# EAGLE board cerebellar (EAGLE 9.6.2)
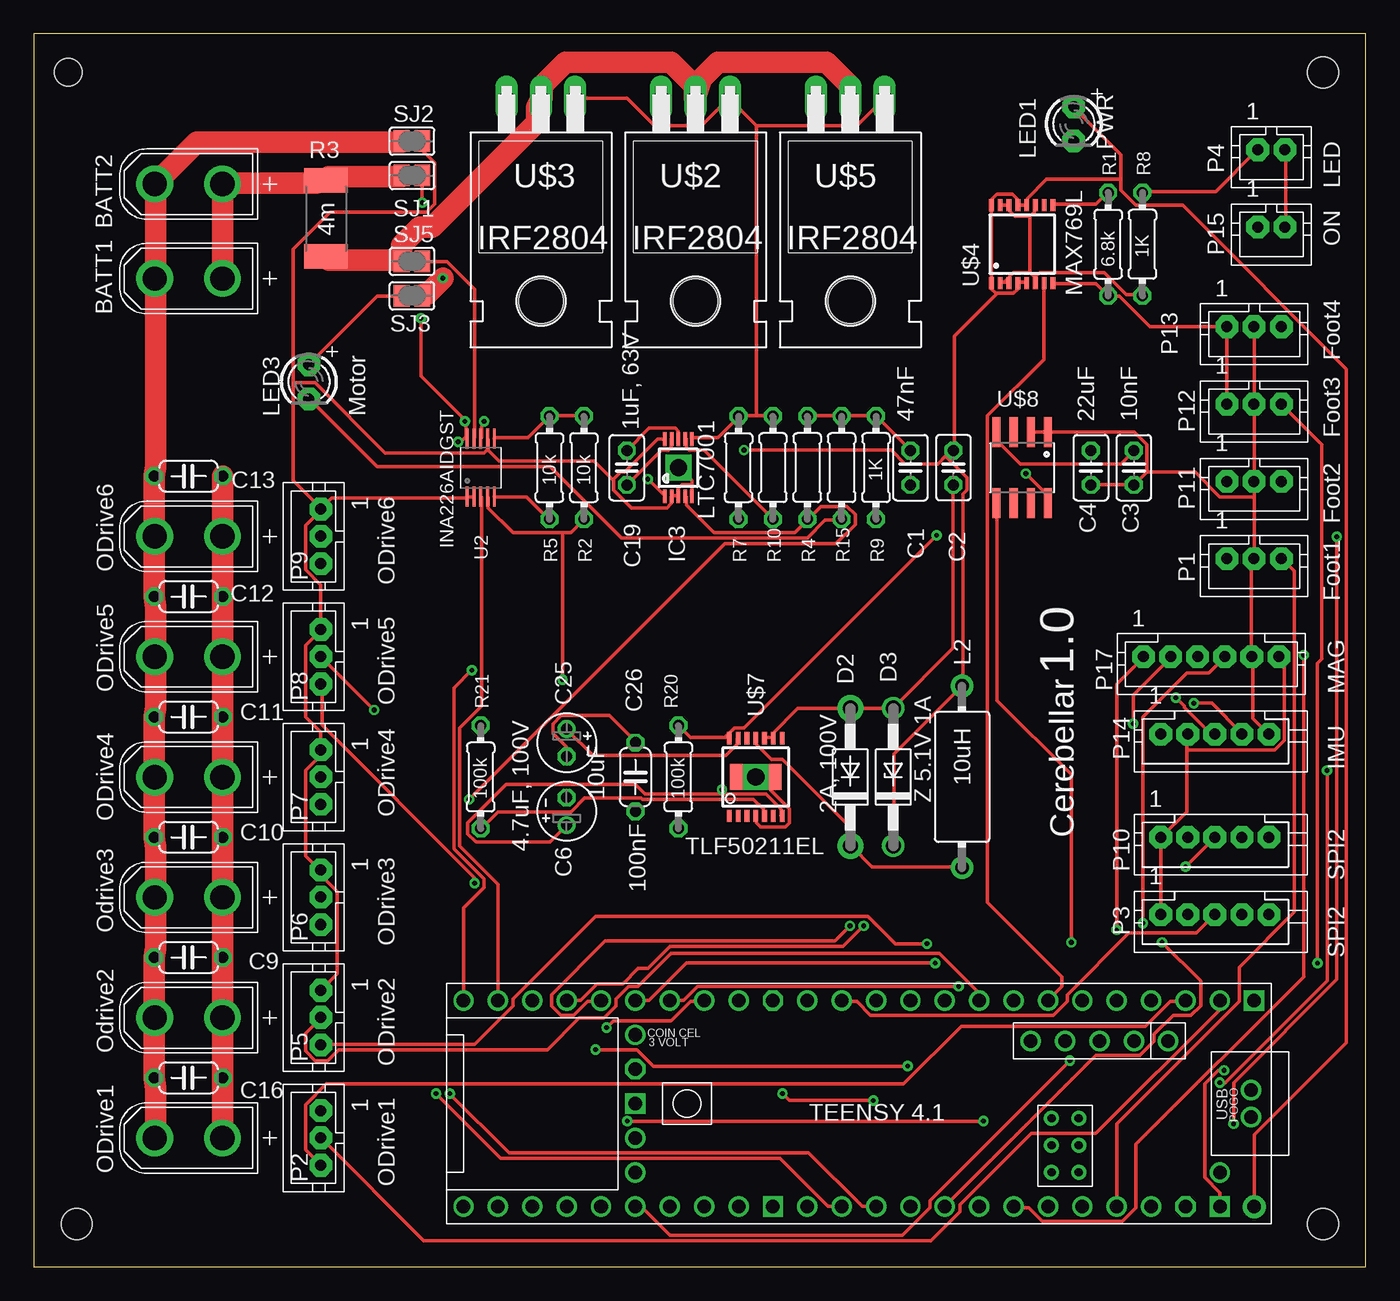
[diagram p0: board, top side]
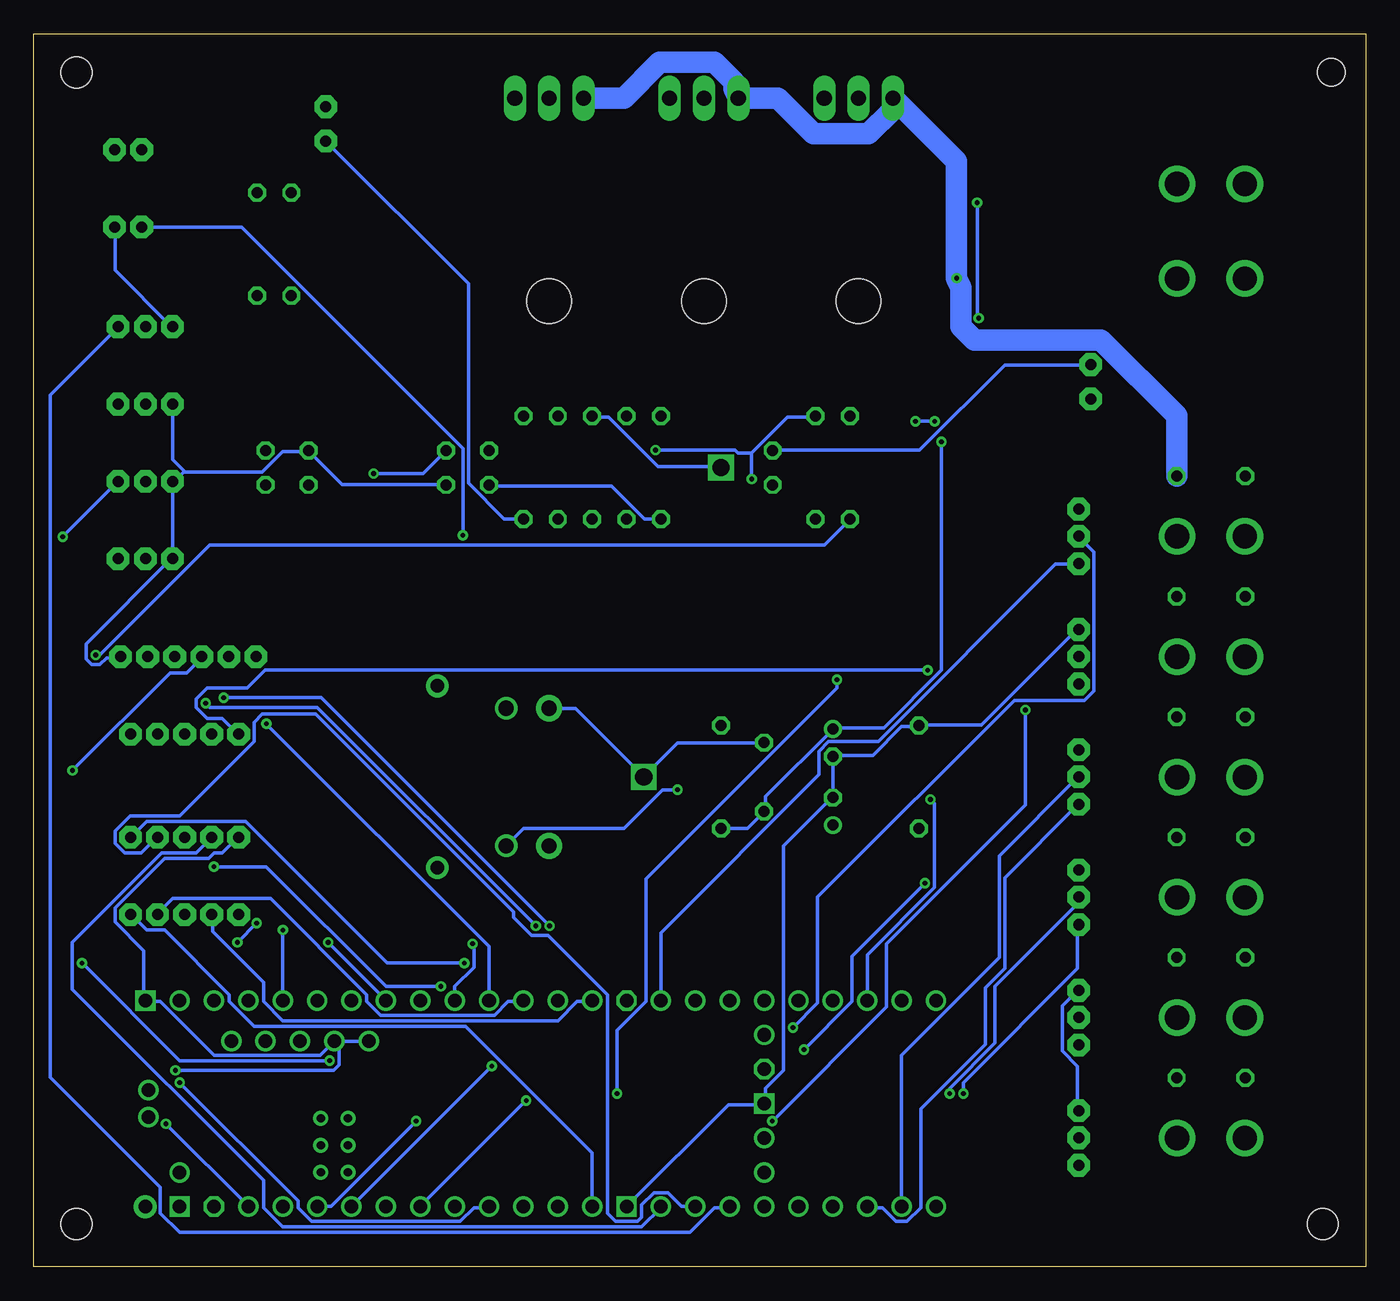
[diagram p1: board, bottom side, seen from below]

Size 98.41 x 91.11 mm. Coordinates in mm from the lower left corner, seen from the top.
Outline: 0,0 98.41,0 98.41,91.11 0,91.11 0,0
Copper layers (1*16): Top 0.035mm / dielectric 1.5mm / Bottom 0.035mm
Design rules "default": minimum track width 6mil, minimum drill 0.35mm, track to track 6mil, track to pad 6mil, pad to pad 6mil, via to via 6mil, smd to smd 6mil, copper to edge 40mil, drill to drill 6mil, minimum pad ring 10mil, minimum via ring 8mil, stop-mask expansion 4mil, vias tented up to drill 0mil, thermal gap 10mil
Net classes: 0 default: width 0.254 mm; 1 Battery: width 1.575 mm
Holes 2.03 mm at 2.54,88.27
Holes 2.29 mm at 3.17,3.17 95.25,88.27 95.25,3.17

## Footprints (pad centres in the part's own frame; a part is rotated, then mirrored left to right if it is on the bottom)
XT30UPB-M = drill 1.8: + 2.5,0; - -2.5,0
C025-025X050 = drill 0.813 octagon: 1 -1.27,0; 2 1.27,0
E2-4 = drill 0.813 pad 1.27: + -1.016,0 | drill 0.813 pad 1.27 octagon: - 1.016,0
C050-024X044 = drill 0.813 octagon: 1 -2.54,0; 2 2.54,0
DO41-10 = drill 1.118 pad 1.93: A 5.08,0; C -5.08,0
DO41Z10 = drill 1.118: A 5.08,0; C -5.08,0
MSOP10 = smd 0.25 x 1: 1 -1,-2.113; 2 -0.5,-2.113; 3 0,-2.113; 4 0.5,-2.113; 5 1,-2.113; 6 1,2.113; 7 0.5,2.113; 8 0,2.113; 9 -0.5,2.113; 10 -1,2.113 | drill 1.27 square: 11 0,0 | smd 1.524 x 1.524: 12 0,0
IRF-3 = drill 1 pad 1.676: 1 -6.705,0; 2 6.73,0
LED3MM = drill 0.813 pad 1.676 octagon: A -1.27,0; K 1.27,0
JST-PH3 = drill 0.813 pad 1.676 octagon: 1 2.016,-1.524; 2 0.016,-1.524; 3 -2.016,-1.524
JST-PH5 = drill 0.813 pad 1.676 octagon: 1 5,0; 2 3,0; 3 1,0; 4 -1,0; 5 -3,0
JST-PH2 = drill 0.813 pad 1.676 octagon: 1 1,0; 2 -1,0
JST-PH6 = drill 0.813 pad 1.676 octagon: 1 5,0; 2 3,0; 3 1,0; 4 -1,0; 5 -3,0; 6 -5,0
0204/7 = drill 0.813 octagon: 1 -3.81,0; 2 3.81,0
R2512 = smd 1.8 x 3.2: 1 -2.8,0; 2 2.8,0
SJ = smd 1.168 x 1.6: 1 -0.762,0; 2 0.762,0
SOP50P490X110-10N = smd 1.47 x 0.28: 1 -2.15,1; 2 -2.15,0.5; 3 -2.15,0; 4 -2.15,-0.5; 5 -2.15,-1; 6 2.15,-1; 7 2.15,-0.5; 8 2.15,0; 9 2.15,0.5; 10 2.15,1
TEENSY41 = drill 1: 0-RX1/CS1/CRX2 -27.94,-7.62; 1-TX1/MISO1/CTX2 -25.4,-7.62; 2-OUT2 -22.86,-7.62; 3-LRCLK2 -20.32,-7.62; 4-BCLK2 -17.78,-7.62; 5-IN2 -15.24,-7.62; 6-OUT1D -12.7,-7.62; 7-RX2/OUT1A -10.16,-7.62; 8-TX2/IN1 -7.62,-7.62; 9-OUT1C -5.08,-7.62; 10-CS\MQSR -2.54,-7.62; 11-MOSI/CTX1 0,-7.62; 12-MISO/MQSL 2.54,-7.62; 13-SCK/LED 2.54,7.62; 14-A0/TX3/SPDIF_OUT 0,7.62; 15-A1/RX3/SPDIF_IN -2.54,7.62; 16-A2/RX4/SCL1 -5.08,7.62; 17-A3/TX4/SDA1 -7.62,7.62; 18-A4/SDA0 -10.16,7.62; 19-A5/SCL0 -12.7,7.62; 20-A6/TX5/LRCLK1 -15.24,7.62; 21-A7/RX5/BCLK1 -17.78,7.62; 22-A8/CTX1 -20.32,7.62; 23-A9/CRX1/MCLK1 -22.86,7.62; 24-A10/TX6/SCL2 7.62,-7.62; 25-A11/RX6/SDA2 10.16,-7.62; 26-A12/MOSI1 12.7,-7.62; 27-A13/SCK1 15.24,-7.62; 28-RX7 17.78,-7.62; 29-TX7 20.32,-7.62; 30-CRX3 22.86,-7.62; 31-CTX3 25.4,-7.62; 32-OUT1B 27.94,-7.62; 33-MCLK2 27.94,7.62; 34-RX8 25.4,7.62; 35-TX8 22.86,7.62; 36-PWM 20.32,7.62; 37-PWM 17.78,7.62; 38-A14/CS/IN1 15.24,7.62; 39-A15/CS/OUT1A 12.7,7.62; 40-A16/CS1 10.16,7.62; 41-A17/MISO1 7.62,7.62; +5V -24.13,-4.62; D+ -30.25,-1; D- -30.25,1; DM -21.59,-4.62; DP -19.05,-4.62; GND4 -16.51,-4.62; GND5 -13.97,-4.62; ON/OFF 15.24,5.08; PROGRAM 15.24,2.54; VBAT 15.24,-5.08; VUSB -27.94,5.08 | drill 1 octagon: 3V3-1 5.08,-7.62; 3V3-2 15.24,-2.54; 3V3-3 -25.4,7.62 | drill 0.6: G -15.51,3.08; LED -17.51,3.08; R+ -17.51,5.08; R- -15.51,5.08; T+ -15.51,1.08; T- -17.51,1.08 | drill 1 square: GND1 -30.48,-7.62; GND2 15.24,0; GND3 5.08,7.62; GND6 -27.94,7.62 | drill 1 pad 1.676: VIN -30.48,7.62
TO-220H = drill 1.118 long: 1 -2.54,-7.62; 2 0,-7.62; 3 2.54,-7.62 | hole 3.302: 0,7.366
TSSOP-16 = smd 0.9 x 0.35: 1 -2.875,2.275; 2 -2.875,1.625; 3 -2.875,0.975; 4 -2.875,0.325; 5 -2.875,-0.325; 6 -2.875,-0.975; 7 -2.875,-1.625; 8 -2.875,-2.275; 9 2.875,-2.275; 10 2.875,-1.625; 11 2.875,-0.975; 12 2.875,-0.325; 13 2.875,0.325; 14 2.875,0.975; 15 2.875,1.625; 16 2.875,2.275
TSSOP-14 = smd 0.9 x 0.35: 1 -2.875,1.95; 2 -2.875,1.3; 3 -2.875,0.65; 4 -2.875,0; 5 -2.875,-0.65; 6 -2.875,-1.3; 7 -2.875,-1.95; 8 2.875,-1.95; 9 2.875,-1.3; 10 2.875,-0.65; 11 2.875,0; 12 2.875,0.65; 13 2.875,1.3; 14 2.875,1.95 | smd 1.93 x 3.81: 15 0,0 | drill 1.27 square: 16 0,0
SO08 = smd 0.61 x 2.21: 1 -1.905,-2.616; 2 -0.635,-2.616; 3 0.635,-2.616; 4 1.905,-2.616; 5 1.905,2.616; 6 0.635,2.616; 7 -0.635,2.616; 8 -1.905,2.616

## Placement (x,y rotation side)
BATT1  XT30UPB-M  [XT30UPB-M]  11.43,73.03 0 top
BATT2  XT30UPB-M  [XT30UPB-M]  11.43,80.01 0 top
C1  47nF  [C025-025X050]  64.77,59.05 90 top
C2  100nF  [C025-025X050]  67.94,59.05 270 top
C3  10nF  [C025-025X050]  81.28,59.05 90 top
C4  22uF  [C025-025X050]  78.1,59.05 90 top
C6  10uF  [E2-4]  39.37,33.66 90 top
C9  2.2uF  [C050-024X044]  11.43,22.86 180 top
C10  2.2uF  [C050-024X044]  11.43,31.75 180 top
C11  2.2uF  [C050-024X044]  11.43,40.64 180 top
C12  2.2uF  [C050-024X044]  11.43,49.53 180 top
C13  2.2uF  [C050-024X044]  11.43,58.42 180 top
C16  2.2uF  [C050-024X044]  11.43,13.97 180 top
C19  1uF, 63V  [C025-025X050]  43.82,59.05 90 top
C25  4.7uF, 100V  [E2-4]  39.37,38.73 270 top
C26  100nF  [C050-024X044]  44.45,36.2 90 top
CON2  ODrive1  [XT30UPB-M]  11.43,9.53 0 top
CON4  Odrive3  [XT30UPB-M]  11.43,27.3 0 top
CON5  ODrive4  [XT30UPB-M]  11.43,36.2 0 top
CON6  Odrive2  [XT30UPB-M]  11.43,18.41 0 top
CON7  ODrive5  [XT30UPB-M]  11.43,45.09 0 top
CON8  ODrive6  [XT30UPB-M]  11.43,53.98 0 top
D2  2A, 100V  [DO41-10]  60.33,36.2 90 top
D3  Z 5.1V 1A  [DO41Z10]  63.5,36.2 90 top
IC3  LTC7001  [MSOP10]  47.62,59.05 0 top
L2  10uH  [IRF-3]  68.58,36.2 90 top
LED1  PWR  [LED3MM]  76.83,84.45 270 top
LED3  Motor  [LED3MM]  20.32,65.41 270 top
P1  Foot1  [JST-PH3]  90.17,50.8 180 top
P2  ODrive1  [JST-PH3]  19.69,9.53 90 top
P3  SPI2  [JST-PH5]  88.27,26.04 180 top
P4  LED  [JST-PH2]  91.44,82.55 180 top
P5  ODrive2  [JST-PH3]  19.69,18.41 90 top
P6  ODrive3  [JST-PH3]  19.69,27.3 90 top
P7  ODrive4  [JST-PH3]  19.69,36.2 90 top
P8  ODrive5  [JST-PH3]  19.69,45.09 90 top
P9  ODrive6  [JST-PH3]  19.69,53.98 90 top
P10  SPI2  [JST-PH5]  88.27,31.75 180 top
P11  Foot2  [JST-PH3]  90.17,56.52 180 top
P12  Foot3  [JST-PH3]  90.17,62.23 180 top
P13  Foot4  [JST-PH3]  90.17,67.94 180 top
P14  IMU  [JST-PH5]  88.27,39.37 180 top
P15  ON  [JST-PH2]  91.44,76.83 180 top
P17  MAG  [JST-PH6]  86.99,45.09 180 top
R1  6.8k  [0204/7]  79.38,75.56 270 top
R2  10k  [0204/7]  40.64,59.05 270 top
R3  4m  [R2512]  21.59,77.47 270 top
R4  10k  [0204/7]  57.15,59.05 90 top
R5  10k  [0204/7]  38.1,59.05 270 top
R7  10  [0204/7]  52.07,59.05 270 top
R8  1K  [0204/7]  81.91,75.56 90 top
R9  1K  [0204/7]  62.23,59.05 90 top
R10  100k  [0204/7]  54.61,59.05 90 top
R15  3.3k  [0204/7]  59.69,59.05 90 top
R20  100k  [0204/7]  47.62,36.2 90 top
R21  100k  [0204/7]  33.02,36.2 90 top
SJ1  0  [SJ]  27.94,80.64 0 top
SJ2  0  [SJ]  27.94,83.19 0 top
SJ3  0  [SJ]  27.94,71.75 0 top
SJ5  0  [SJ]  27.94,74.3 180 top
U2  INA226AIDGST  [SOP50P490X110-10N]  33.02,59.05 90 top
U$1  TEENSY41  [TEENSY41]  59.69,12.06 180 top
U$2  IRF2804  [TO-220H]  48.9,78.74 180 top
U$3  IRF2804  [TO-220H]  37.46,78.74 180 top
U$4  MAX769L  [TSSOP-16]  73.02,75.56 90 top
U$5  IRF2804  [TO-220H]  60.33,78.74 180 top
U$7  TLF50211EL  [TSSOP-14]  53.34,36.2 90 top
U$8  LT1763  [SO08]  73.02,59.05 180 top

## Library data of the parts
BATT1 BATT2 CON2 CON4-CON8 = amass
C1-C4 C6 C9-C13 C16 C19 C25 C26 = rcl; SPICEPREFIX: C
D2 LED1 LED3 = adafruit
D3 = diode
IC3 = LTC7001; MPN: AD7992BRMZ-0; OC_FARNELL: 1078311; OC_NEWARK: 31M4422
L2 = rcl; SPICEPREFIX: L
P1-P15 P17 = jst-ph
R1 R2 R4 R5 R7-R10 R15 R20 R21 = rcl; SPICEPREFIX: R
R3 = rcl; DIGIKEY: 541-WSK25124L000FEACT-ND; LINK: https://octopart.com/wsk25124l000fea-vishay-41934978?r=sp; MOUSER: 71-WSK25124L000FEA; SPICEPREFIX: R
SJ1-SJ3 SJ5 = jumper
U2 = INA226AIDGST; AVAILABILITY: In Stock; DESCRIPTION: 36V, 16-bit, ultra-precise i2c output current/voltage/power monitor w/alert; MF: Texas Instruments; MP: INA226AIDGST; PACKAGE: VSSOP-10 Texas Instruments; PRICE: None; PURCHASE-URL: https://pricing.snapeda.com/search/part/INA226AIDGST/?ref=eda
U$1 = teensy
U$2 U$3 U$5 = IRF2804
U$4 = MAX869
U$7 = TLF50211EL
U$8 = LT1763

## Nets
+3.3V: C3.1 C4.1 P1.2 P11.2 P12.2 P13.2 P14.5 P17.5 U$8.1 U$8.2
+5V: C2.1 C6.+ D3.C IC3.1 L2.2 LED1.A R2.1 R5.1 U2.6 U$1.VIN U$4.1 U$4.4 U$4.5 U$4.12 U$4.13 U$4.16 U$7.7 U$8.8
BATT+ [Battery]: BATT1.+ BATT2.+ R3.1 SJ1.1
BATT- [Battery]: BATT1.- BATT2.- C9.2 C10.2 C11.2 C12.2 C13.2 C16.2 CON2.- CON4.- CON5.- CON6.- CON7.- CON8.- SJ2.1
CS: P3.4 U$1.10-CS\MQSR
CS1: P10.4 U$1.40-A16/CS1
DRAIN [Battery]: R3.2 SJ5.2 U$2.2 U$3.2 U$5.2
GATE: IC3.6 R7.1 R10.2 U$2.1 U$3.1 U$5.1
GND: C1.2 C2.2 C4.2 C6.- C25.- C26.2 D2.A D3.A IC3.2 IC3.3 IC3.5 IC3.10 IC3.11 IC3.12 P1.1 P2.1 P3.1 P4.2 P5.1 P6.1 P7.1 P8.1 P9.1 P10.1 P11.1 P12.1 P13.1 P14.2 P15.2 P17.6 R1.2 R4.2 R9.2 R15.2 R21.2 SJ2.2 U2.1 U2.2 U2.7 U$1.GND1 U$1.GND2 U$1.GND3 U$1.GND4 U$1.GND5 U$1.GND6 U$4.8 U$7.4 U$7.9 U$7.10 U$7.15 U$7.16
IMU_ENABLE: P14.1 U$1.32-OUT1B
LED_PWM: U$1.5-IN2 U$4.7
MAG_EN: P17.2 U$1.9-OUT1C
MAG_INT: P17.1 U$1.3-LRCLK2
MAG_SCL: P17.3 U$1.16-A2/RX4/SCL1
MAG_SDA: P17.4 U$1.17-A3/TX4/SDA1
MISO: P3.2 U$1.12-MISO/MQSL
MISO1: P10.2 U$1.41-A17/MISO1
MOSI: P3.3 U$1.11-MOSI/CTX1
MOSI1: P10.3 U$1.26-A12/MOSI1
N$1: C1.1 R7.2
N$2: R1.1 U$4.9
N$3: P4.1 R8.2
N$4: IC3.7 R10.1
N$5: U2.3 U$1.31-CTX3
N$6: R8.1 U$4.2 U$4.3 U$4.6 U$4.11 U$4.14 U$4.15
N$7: U$1.3V3-3
N$8: C3.2 U$8.4
N$9: U$1.6-OUT1D U$8.5
N$10: IC3.4 R4.1 U$1.30-CRX3
N$17: R5.2 U2.5 U$1.19-A5/SCL0
N$18: SJ5.1 U2.9
N$22: R2.2 U2.4 U$1.18-A4/SDA0
N$24: C19.1 IC3.9
N$26: C19.2 IC3.8 LED3.A SJ3.1
N$30: LED3.K R15.1
N$39: LED1.K R9.1
N$42: D2.C L2.1 U$7.11
N$46: R21.1 U$7.5
N$47: P15.1 R20.2 U$7.14
O1_RX: P2.2 U$1.0-RX1/CS1/CRX2
O1_TX: P2.3 U$1.1-TX1/MISO1/CTX2
O2_RX: P5.2 U$1.7-RX2/OUT1A
O2_TX: P5.3 U$1.8-TX2/IN1
O3_RX: P6.2 U$1.15-A1/RX3/SPDIF_IN
O3_TX: P6.3 U$1.14-A0/TX3/SPDIF_OUT
O4_RX: P7.2 U$1.34-RX8
O4_TX: P7.3 U$1.35-TX8
O5_RX: P8.2 U$1.21-A7/RX5/BCLK1
O5_TX: P8.3 U$1.20-A6/TX5/LRCLK1
O6_RX: P9.2 U$1.25-A11/RX6/SDA2
O6_TX: P9.3 U$1.24-A10/TX6/SCL2
POWER+ [Battery]: C9.1 C10.1 C11.1 C12.1 C13.1 C16.1 CON2.+ CON4.+ CON5.+ CON6.+ CON7.+ CON8.+ SJ3.2 U$2.3 U$3.3 U$5.3
RXD: P14.4 U$1.29-TX7
SCK: P3.5 U$1.13-SCK/LED
SCK1: P10.5 U$1.27-A13/SCK1
SENS1: P1.3 U$1.22-A8/CTX1
SENS2: P11.3 U$1.23-A9/CRX1/MCLK1
SENS3: P12.3 U$1.38-A14/CS/IN1
SENS4: P13.3 U$1.39-A15/CS/OUT1A
TXD: P14.3 U$1.28-RX7
V+: C25.+ C26.1 R20.1 SJ1.2 U2.8 U2.10 U$7.13

## Tracks (layer width: path | path; a pad name or v marks a point on that pad's centre or on a via)
+3.3V
  Top 0.254: U$8.2 U$8.1 81.33,61.67 82.24,60.76 82.24,58.73 | 82.24,58.73 81.33,57.81 C3.1 81.23,57.81 78.18,57.81 C4.1 | P14.5 91.19,39.42 90.07,40.54 90.07,45.01 P17.5 89.97,45.21 89.97,52.02 90.17,52.22 P1.2 90.17,52.32 90.17,56.9 | 90.17,56.9 90.17,58.01 P11.2 90.17,58.12 90.17,63.7 P12.2 90.17,63.8 90.17,69.39 P13.2 | 82.24,58.73 85.8,58.73 87.63,56.9 90.17,56.9
+5V  (via drill 0.35)
  Top 0.254: 50.85,34.95 45.16,34.95 44.45,35.66 34.9,35.66 32.05,32.82 32.05,32 32.66,31.39 38.15,31.39 39.37,32.61 C6.+ | 50.85,34.95 54.1,34.95 55.22,33.83 55.22,33.33 U$7.7 | D3.C 63.55,31.19 63.55,37.9 68.53,42.88 L2.2 68.63,42.98 68.63,57.1 68.94,57.4 68.94,58.32 67.36,59.89 | U2.6 34.09,61.27 36.52,61.27 38.05,62.79 R5.1 38.15,62.89 40.59,62.89 R2.1 | v45.36,58.22 46.58,57 IC3.1 | U$8.8 74.93,57 v73.3,58.62 | 71.07,71.93 70.76,72.24 70.76,72.64 U$4.1 70.76,72.75 70.76,78.33 U$4.16 70.76,78.54 70.76,78.84 71.17,79.25 72.29,79.25 72.69,78.84 72.69,78.54 U$4.13 72.8,78.44 73.3,78.44 U$4.12 73.41,78.54 73.41,78.94 74.83,80.37 80.31,80.37 | 71.07,71.93 72.39,71.93 72.69,72.24 72.69,72.64 U$4.4 72.8,72.75 73.3,72.75 U$4.5 | U$1.VIN 90.17,9.75 96.98,16.56 96.98,66.34 84.89,78.44 81.43,78.44 80.31,79.55 80.31,80.37 | 80.31,80.37 80.31,82.19 76.86,85.65 LED1.A | 71.07,71.93 71.07,71.83 68.02,68.78 68.02,60.35 C2.1 67.82,60.35 67.36,59.89 | v52.48,60.35 63.35,60.35 64.36,59.33 66.8,59.33 67.36,59.89 | v50.85,35.26 50.85,34.95
  Bottom 0.254: 45.36,60.15 v45.36,58.22 | 45.36,60.15 42.72,62.79 40.69,62.79 R2.1 | v73.3,58.62 69.65,58.62 C2.1 | 45.36,60.15 46.38,60.15 46.58,60.35 v52.48,60.35 | v50.85,35.26 51.97,35.26 54.81,32.41 62.23,32.41 63.45,31.19 D3.C
BATT+
  Top 1.575: SJ1.1 27.18,80.57 21.79,80.57 21.59,80.37 R3.1 20.88,80.06 13.97,80.06 BATT2.+ 13.97,79.25 13.97,73.05 BATT1.+
BATT-
  Top 1.575: SJ2.1 27.18,83.11 12.04,83.11 8.99,80.06 BATT2.- 8.99,79.25 8.99,73.05 BATT1.- 8.99,72.24 8.99,59.13 C13.2 8.89,54.76 CON8.- 8.89,53.95 C12.2 8.99,48.77 8.99,45.11 CON7.- 8.99,44.3 8.99,41.35 C11.2 8.89,36.98 CON5.- 8.89,36.17 C10.2 8.99,30.99 8.99,27.33 CON4.- 8.99,26.52 8.99,23.57 C9.2 8.89,19.2 CON6.- 8.89,18.39 C16.2 8.99,13.21 8.99,9.55 CON2.-
CS
  Bottom 0.254: U$1.10-CS\MQSR 62.23,19.61 63.35,19.61 64.36,18.59 72.8,18.59 73.81,19.61 73.81,20.12 80.92,27.23 88.14,27.23 89.26,26.11 P3.4
CS1
  Bottom 0.254: U$1.40-A16/CS1 49.53,4.47 50.55,4.47 51.56,5.49 52.58,5.49 53.49,4.57 53.49,3.66 53.8,3.35 55.42,3.35 56.03,3.96 56.03,20.12 60.4,24.49 61.62,24.49 62.94,25.81 62.94,26.21 77.57,40.84 81.53,40.84 82.14,40.23 82.14,38.81 87.63,33.33 91.29,33.33 92.41,32.21 92.41,31.29 91.69,30.58 90.47,30.58 89.36,31.7 P10.4
DRAIN
  Top 1.575: R3.2 21.59,74.57 21.79,74.37 27.18,74.37 SJ5.2 27.18,75.49 28.5,76.81 29.41,76.81 37.13,84.53 37.13,85.65 U$3.2 37.54,86.36 37.54,87.27 39.27,89 47.09,89 48.82,87.27 48.82,86.36 U$2.2 49.33,87.78 50.55,89 58.57,89 60.3,87.27 60.3,86.36 U$5.2
GATE
  Top 0.254: IC3.6 48.72,61.27 50.55,61.27 52.07,62.79 R7.1 52.17,62.89 53.39,62.89 | 53.39,62.89 54.61,62.89 R10.2 | U$3.1 43.84,86.36 45.87,84.33 49.33,84.33 51.36,86.36 U$2.1 51.46,86.26 53.39,84.33 | 53.39,84.33 60.81,84.33 62.84,86.36 U$5.1 | 53.39,84.33 53.39,62.89
GND  (via drill 0.35)
  Top 0.254: P15.2 92.51,76.91 92.51,82.5 P4.2 | U$4.8 75.34,72.64 78.49,72.64 R1.2 79.4,71.73 80.21,71.73 82.45,69.49 88.04,69.49 P13.1 88.14,69.39 88.14,63.8 P12.1 | U$1.GND6 87.63,5.49 86.51,6.6 86.51,13.51 87.53,14.53 v87.93,14.53 | P3.1 83.26,26.11 83.26,31.7 P10.1 83.36,31.8 85.19,33.63 85.19,38.2 | 85.19,38.2 85.19,39.32 P14.2 | 85.19,38.2 91.69,38.2 92.41,38.91 92.41,44.6 92,45.01 P17.6 | U$7.10 54,39.12 54.61,39.12 U$7.9 54.61,39.22 54.61,39.42 56.44,41.25 60.3,41.25 D2.A 60.4,41.25 63.45,41.25 D3.A 63.55,41.35 67.92,45.72 67.92,57.71 C2.2 | U$7.4 53.39,33.22 53.39,32.82 53.7,32.51 55.52,32.51 55.83,32.82 55.83,33.83 53.39,36.27 U$7.16 53.39,36.17 | C25.- 39.37,38.41 38.35,39.42 38.35,40.13 38.96,40.74 42.52,40.74 44.45,38.81 C26.2 | P5.1 21.29,20.52 22.4,21.64 22.4,27.74 21.29,28.85 21.29,29.26 P6.1 21.08,29.36 20.07,30.38 20.07,36.68 21.18,37.8 21.18,38.1 P7.1 21.18,38.3 21.18,39.52 20.07,40.64 20.07,45.92 21.18,47.04 P8.1 21.18,47.14 21.18,50.39 20.07,51.51 20.07,54.76 21.18,55.88 P9.1 | R4.2 57.15,62.89 59.69,62.89 R15.2 59.79,62.89 62.23,62.89 R9.2 62.33,62.79 64.77,60.35 C1.2 | 48.62,57.81 48.62,58.12 47.7,59.03 IC3.12 47.6,59.03 | 48.62,57.81 48.62,57 IC3.5 | 42.82,58.22 43.33,58.73 43.64,58.73 46.08,61.16 46.58,61.16 IC3.10 | 42.82,58.22 42.82,57.4 44.15,56.08 46.79,56.08 47.09,56.39 47.09,56.9 IC3.2 47.19,57 47.6,57 IC3.3 47.6,57.1 47.6,57.51 47.9,57.81 48.62,57.81 | 33.58,60.35 33.58,61.16 U2.7 | 33.58,60.35 34.39,59.54 41.4,59.54 42.72,58.22 42.82,58.22 | U2.2 32.46,56.9 32.05,56.9 U2.1 31.95,56.79 22,56.79 21.29,56.08 P9.1
  Top 0.254: SJ2.2 28.7,82.5 29.62,81.58 29.62,78.54 29.01,77.93 21.89,77.93 19.15,75.18 19.15,65.33 | 19.15,65.33 19.15,58.12 21.18,56.08 P9.1 | 19.15,65.33 20.78,65.33 25.96,60.15 33.27,60.15 33.48,60.35 33.58,60.35
  Bottom 0.254: P15.2 92.41,76.81 92.41,73.66 88.24,69.49 P13.1 | v87.93,14.53 76.25,14.53 75.84,14.94 75.84,16.36 76.15,16.66 U$1.GND4 | U$1.GND5 73.71,16.66 75.44,16.66 75.74,16.36 U$1.GND4 | U$1.GND4 76.25,16.66 77.27,15.65 85.09,15.65 89.05,19.61 90.17,19.61 U$1.GND1 90.27,19.71 90.27,23.37 92.41,25.5 92.41,26.52 88.75,30.18 85.5,30.18 85.09,30.58 84.48,30.58 83.36,31.7 P10.1 | C2.2 68.02,57.81 75.64,57.81 78.08,60.25 C4.2 78.18,60.25 80.01,60.25 81.53,58.73 87.32,58.73 | P17.6 92,45.01 93.02,45.01 93.52,44.5 94.13,44.5 94.54,44.91 94.54,46.02 88.24,52.32 P1.1 88.14,52.43 88.14,58.01 P11.1 88.04,58.01 87.32,58.73 | P12.1 88.14,63.7 88.14,59.64 87.32,58.83 87.32,58.73 | U$1.GND3 54.61,4.47 47.09,11.99 44.45,11.99 U$1.GND2 44.35,12.09 44.35,13.21 43.03,14.53 43.03,31.09 39.47,34.65 C6.- C25.- 39.27,37.8 36.42,37.8 34.29,39.93 33.07,39.93 R21.2 32.97,40.03 28.4,40.03 21.29,47.14 P8.1 | C26.2 44.45,38.71 50.85,38.71 53.29,36.27 U$7.16 53.39,36.27 58.37,41.25 60.3,41.25 D2.A | P2.1 21.29,11.58 21.29,14.83 22.4,15.95 22.4,19.3 21.29,20.42 P5.1 | R4.2 57.15,62.79 55.93,62.79 52.27,59.13 47.7,59.13 IC3.12
IMU_ENABLE  (via drill 0.35)
  Top 0.254: U$1.32-OUT1B 31.75,26.52 33.27,28.04 33.27,28.65 31.04,30.89 31.04,42.77 v32.36,44.09
  Bottom 0.254: v32.36,44.09 81.33,44.09 82.65,42.77 85.6,42.77 86.41,41.96 86.41,41.35 85.6,40.54 84.48,40.54 83.36,39.42 P14.1
LED_PWM
  Top 0.254: U$4.7 74.62,72.64 74.62,67.06 70.46,62.89 70.46,26.92 75.95,21.44 75.95,20.73 74.93,19.71 U$1.5-IN2
MAG_EN  (via drill 0.35)
  Top 0.254: v81.23,40.13 81.23,42.27 83.97,45.01 P17.2
  Bottom 0.254: U$1.9-OUT1C 64.77,23.67 v81.23,40.13
MAG_INT  (via drill 0.35)
  Top 0.254: v80.01,24.89 80.01,43.08 81.94,45.01 P17.1
  Bottom 0.254: v80.01,24.89 U$1.3-LRCLK2
MAG_SCL  (via drill 0.35)
  Top 0.254: v87.63,13.61 88.04,13.61 95.55,21.13 v95.55,36.68
  Bottom 0.254: v87.63,13.61 78.89,4.88 78.89,4.37 77.88,3.35 66.9,3.35 65.89,4.37 64.77,4.37 U$1.16-A2/RX4/SCL1 | v95.55,36.68 88.34,43.89 87.12,43.89 86,45.01 P17.3
MAG_SDA  (via drill 0.35)
  Top 0.254: v83.36,23.98 86.21,21.13 86.21,19.3 85.5,18.59 84.18,18.59 82.75,17.17 82.75,16.66 81.74,15.65 78.49,15.65 67.31,4.47 U$1.17-A3/TX4/SDA1 | v81.94,25.4 81.94,40.64 85.19,43.89 86.82,43.89 87.93,45.01 P17.4
  Bottom 0.254: v81.94,25.4 v83.36,23.98
MISO
  Bottom 0.254: U$1.12-MISO/MQSL 57.15,19.61 58.27,19.61 59.69,18.19 80.01,18.19 81.43,19.61 81.43,21.03 85.19,24.79 85.19,26.01 P3.2
MISO1
  Bottom 0.254: U$1.41-A17/MISO1 52.07,4.37 53.49,2.95 80.01,2.95 81.43,4.37 81.43,6.4 95.55,20.52 95.55,23.98 88.95,30.58 86.41,30.58 85.29,31.7 P10.2
MOSI
  Top 0.254: U$1.11-MOSI/CTX1 59.69,19.61 60.81,19.61 61.82,18.59 75.34,18.59 76.35,19.61 76.35,20.12 80.92,24.69 85.9,24.69 87.22,26.01 P3.3
MOSI1  (via drill 0.35)
  Top 0.254: v68.33,20.73 49.02,20.73 48.01,19.71 46.99,19.71 U$1.26-A12/MOSI1 | v85.09,29.57 87.22,31.7 P10.3
  Bottom 0.254: v68.33,20.73 72.39,20.73 81.23,29.57 v85.09,29.57
N$1
  Bottom 0.254: R7.2 52.07,55.27 53.29,55.27 55.73,57.71 64.77,57.71 C1.1
N$2
  Top 0.254: U$4.9 75.34,78.54 78.49,78.54 79.3,79.35 R1.1
N$3
  Top 0.254: R8.2 81.94,79.45 87.32,79.45 90.37,82.5 P4.1
N$4
  Top 0.254: IC3.7 48.21,61.16 48.21,60.55 48.41,60.35 49.53,60.35 54.61,55.27 R10.1
N$5
  Top 0.254: U$1.31-CTX3 34.29,28.25 31.45,31.09 31.45,39.83 33.07,41.45 33.07,56.9 U2.3
N$6
  Top 0.254: 71.78,72.75 71.98,72.75 U$4.3 | 71.78,72.75 71.48,72.75 U$4.2 | 73.91,73.15 73.91,72.75 U$4.6 | 73.61,73.46 73.91,73.15 | 73.61,73.46 72.39,73.46 71.78,72.85 71.78,72.75 | U$4.15 71.48,78.44 71.98,78.44 U$4.14 72.08,78.33 72.08,78.03 72.49,77.62 73.61,77.62 | 73.61,77.62 73.91,77.93 73.91,78.44 U$4.11 | 73.61,77.62 73.61,73.46 | R8.1 81.84,71.83 80.72,71.83 79.1,73.46 74.32,73.46 74.02,73.15 73.91,73.15
N$8
  Top 0.254: U$8.4 71.17,61.67 71.17,61.06 72.9,59.33 80.31,59.33 81.23,60.25 C3.2
N$9  (via drill 0.35)
  Top 0.254: v76.66,23.98 76.66,36.37 71.17,41.86 71.17,56.39 U$8.5
  Bottom 0.254: v76.66,23.98 72.39,19.71 U$1.6-OUT1D
N$10  (via drill 0.35)
  Top 0.254: IC3.4 48.21,56.9 48.21,56.29 50.24,54.25 56.24,54.25 57.15,55.17 R4.1 57.25,55.27 58.17,56.19 60.1,56.19 60.71,55.58 60.71,54.86 59.28,53.44 51.05,53.44 v32.16,34.54
  Bottom 0.254: U$1.30-CRX3 36.83,23.06 31.85,28.04 31.85,34.24 v32.16,34.54
N$17  (via drill 0.35)
  Top 0.254: U2.5 34.09,56.9 36.42,56.9 38.05,55.27 R5.2 | v93.83,45.21 93.83,21.44 81.43,9.04 81.43,4.37 80.42,3.35 74.52,3.35 73.51,4.37 72.39,4.37 U$1.19-A5/SCL0
  Bottom 0.254: v93.83,45.21 93.52,45.21 85.39,53.34 39.98,53.34 38.15,55.17 R5.2
N$18
  Top 0.254: U2.9 32.56,61.27 32.56,72.24 30.53,74.27 28.7,74.27 SJ5.1
N$22  (via drill 0.35)
  Top 0.254: 39.07,54.25 39.68,54.25 40.59,55.17 R2.2 | 39.07,54.25 35.41,54.25 33.58,56.08 33.58,56.9 U2.4 | v62.03,12.29 55.83,12.29 v55.32,12.8 | 39.07,54.25 v39.07,43.38
  Bottom 0.254: v62.03,12.29 69.85,4.47 U$1.18-A4/SDA0 | v55.32,12.8 55.32,17.48 53.19,19.61 53.19,28.65 39.07,42.77 v39.07,43.38
N$24
  Top 0.254: C19.1 46.38,60.35 46.89,60.35 47.09,60.55 47.09,61.16 IC3.9
N$26
  Top 0.254: C19.2 45.47,61.98 47.4,61.98 47.6,61.77 47.6,61.27 IC3.8 | SJ3.1 27.18,71.73 25.35,71.73 20.37,66.75 LED3.A
  Bottom 0.254: C19.2 43.74,60.35 32.97,60.35 26.67,66.65 20.37,66.65 LED3.A
N$30
  Top 0.254: R15.1 59.69,55.17 58.47,55.17 57.15,53.85 43.43,53.85 38.15,59.13 25.35,59.13 20.37,64.11 LED3.K
N$39
  Bottom 0.254: LED1.K 66.29,72.64 66.29,57.91 63.65,55.27 62.23,55.27 R9.1
N$42
  Top 0.254: U$7.11 53.39,39.01 53.39,38.61 54.51,37.49 55.32,37.49 60.3,32.51 60.3,31.19 D2.C 60.4,31.09 61.93,29.57 68.53,29.57 L2.1
N$46
  Top 0.254: U$7.5 53.9,33.33 53.9,33.83 53.19,34.54 44.96,34.54 44.86,34.65 40.69,34.65 39.68,33.63 34.29,33.63 33.07,32.41 R21.1
N$47  (via drill 0.35)
  Top 0.254: 51.16,39.12 48.51,39.12 R20.2 | 51.16,39.12 51.36,39.12 U$7.14 | v66.7,54.05 52.48,39.83 51.77,39.83 51.16,39.22 51.16,39.12
  Bottom 0.254: v66.7,54.05 66.7,60.45 83.06,76.81 90.37,76.81 P15.1
O1_RX
  Top 0.254: U$1.0-RX1/CS1/CRX2 87.63,19 78.49,9.86 73.71,9.86 68.43,4.57 68.43,4.06 66.29,1.93 28.8,1.93 21.29,9.45 P2.2
O1_TX
  Top 0.254: U$1.1-TX1/MISO1/CTX2 85.09,19.61 83.97,19.61 82.14,17.78 68.53,17.78 64.26,13.51 21.59,13.51 20.07,11.99 20.07,8.64 21.18,7.52 P2.3
O2_RX
  Top 0.254: U$1.7-RX2/OUT1A 69.85,20.22 66.9,23.16 47.09,23.16 44.65,20.73 43.94,20.73 43.03,19.81 43.03,19.3 42.11,18.39 40.28,18.39 37.95,16.05 22.5,16.05 21.69,15.24 20.78,15.24 20.07,15.95 20.07,17.27 21.18,18.39 P5.2
O2_TX  (via drill 0.35)
  Top 0.254: v65.99,23.88 63.65,23.88 61.62,25.91 41.5,25.91 35.41,19.81 35.41,19.3 32.56,16.46 21.29,16.46 P5.3
  Bottom 0.254: U$1.8-TX2/IN1 67.31,20.73 65.89,22.15 65.89,23.77 v65.99,23.88
O3_RX  (via drill 0.35)
  Top 0.254: v30.73,12.8 35.1,8.43 57.25,8.43 61.21,4.47 62.23,4.47 U$1.15-A1/RX3/SPDIF_IN
  Bottom 0.254: v30.73,12.8 30.73,13.21 27.38,16.56 27.38,20.73 21.29,26.82 21.29,27.23 P6.2
O3_TX  (via drill 0.35)
  Top 0.254: v29.72,12.8 34.49,8.03 55.12,8.03 58.67,4.47 59.69,4.47 U$1.14-A0/TX3/SPDIF_OUT
  Bottom 0.254: v29.72,12.8 29.72,13.61 21.29,22.05 21.29,25.2 P6.3
O4_RX
  Bottom 0.254: U$1.34-RX8 34.29,15.65 27.08,22.86 27.08,30.38 21.29,36.17 P7.2
O4_TX
  Bottom 0.254: U$1.35-TX8 36.83,4.37 35.71,4.37 34.7,3.35 33.88,3.35 32.87,4.37 32.87,11.68 28.09,16.46 28.09,20.62 26.67,22.05 26.67,28.75 21.29,34.14 P7.3
O5_RX  (via drill 0.35)
  Top 0.254: v43.84,10.77 v70.16,10.77 | v25.15,41.15 21.29,45.01 P8.2
  Bottom 0.254: v70.16,10.77 76.45,4.47 77.47,4.47 U$1.21-A7/RX5/BCLK1 | v43.84,10.77 35.41,19.2 35.41,23.88 25.15,34.14 v25.15,41.15
O5_TX  (via drill 0.35)
  Top 0.254: v64.57,14.83 45.77,14.83 44.55,16.05 v41.5,16.05 | v32.56,28.35 32.56,28.75 21.29,40.03 21.29,42.98 P8.3
  Bottom 0.254: v64.57,14.83 74.93,4.47 U$1.20-A6/TX5/LRCLK1 | v41.5,16.05 37.95,19.61 37.95,22.96 v32.56,28.35
O6_RX  (via drill 0.35)
  Top 0.254: v42.32,17.68 42.82,18.19 47.09,18.19 48.51,19.61 49.53,19.61 U$1.25-A11/RX6/SDA2
  Bottom 0.254: v42.32,17.68 40.49,19.51 40.49,27.33 25.96,41.86 20.78,41.86 20.07,42.57 20.07,52.83 21.18,53.95 P9.2
O6_TX
  Bottom 0.254: U$1.24-A10/TX6/SCL2 52.07,24.69 40.39,36.37 40.39,38.1 39.68,38.81 36.02,38.81 22.91,51.92 21.29,51.92 P9.3
POWER+  (via drill 0.35)
  Top 1.575: v30.23,73.05 29.01,71.83 28.7,71.83 SJ3.2 | C13.1 13.97,54.76 CON8.+ 13.97,53.95 C12.1 13.97,45.11 CON7.+ 13.97,44.3 C11.1 13.97,36.98 CON5.+ 13.97,36.17 C10.1 13.97,27.33 CON4.+ 13.97,26.52 C9.1 13.97,19.2 CON6.+ 13.97,18.39 C16.1 13.97,9.55 CON2.+
  Bottom 1.575: U$5.3 54.81,86.36 52.17,89 48.11,89 46.69,87.58 46.69,87.07 U$2.3 43.43,86.36 40.79,83.72 36.73,83.72 35,85.45 U$3.3 34.9,86.36 30.23,81.69 v30.23,73.05 29.92,72.34 29.92,69.49 28.91,68.48 19.56,68.48 13.97,62.89 C13.1
RXD  (via drill 0.35)
  Top 0.254: v61.32,25.2 59.79,23.67 46.99,23.67 45.36,22.05 44.65,22.05 43.54,20.93 41.61,20.93 40.39,19.71 39.37,19.71 U$1.29-TX7 | v85.7,41.66 87.02,41.66 89.26,39.42 P14.4
  Bottom 0.254: v61.32,25.2 77.47,41.35 85.39,41.35 v85.7,41.66
SCK
  Bottom 0.254: U$1.13-SCK/LED 57.15,8.43 66.5,17.78 82.14,17.78 83.97,19.61 83.97,20.12 88.75,24.89 90.07,24.89 91.19,26.01 P3.5
SCK1  (via drill 0.35)
  Top 0.254: v66.6,22.45 48.21,22.45 45.47,19.71 44.45,19.71 U$1.27-A13/SCK1
  Bottom 0.254: v66.6,22.45 72.29,22.45 82.75,32.92 90.07,32.92 91.19,31.8 P10.5
SENS1
  Top 0.254: U$1.22-A8/CTX1 80.01,10.57 89.05,19.61 89.05,22.15 93.12,26.21 93.12,51.41 92.2,52.32 P1.3
SENS2  (via drill 0.35)
  Top 0.254: v88.65,10.57 88.65,13.61 96.27,21.23 v96.27,53.95
  Bottom 0.254: v88.65,10.57 82.55,4.47 U$1.23-A9/CRX1/MCLK1 | v96.27,53.95 92.2,58.01 P11.3
SENS3  (via drill 0.35)
  Top 0.254: v76.56,15.24 66.19,4.88 66.19,4.37 64.16,2.34 46.99,2.34 44.96,4.37 44.45,4.37 U$1.38-A14/CS/IN1 | v94.84,22.45 94.84,44.6 95.15,44.91 95.15,60.76 92.2,63.7 P12.3
  Bottom 0.254: v76.56,15.24 87.63,15.24 v94.84,22.45
SENS4
  Bottom 0.254: U$1.39-A15/CS/OUT1A 46.99,4.37 48.11,4.37 49.94,2.54 87.63,2.54 89.05,3.96 89.05,5.89 97.18,14.02 97.18,64.41 92.2,69.39 P13.3
TXD  (via drill 0.35)
  Top 0.254: v60.3,25.2 59.18,24.08 42.22,24.08 38.25,20.12 38.25,19.3 38.96,18.59 39.88,18.59 40.89,19.61 41.91,19.61 U$1.28-RX7 | v84.38,42.06 84.99,41.45 84.99,41.35 86.92,39.42 87.22,39.42 P14.3
  Bottom 0.254: v60.3,25.2 77.16,42.06 v84.38,42.06
V+  (via drill 0.35)
  Top 0.254: U$7.13 51.97,39.01 51.97,38.61 51.16,37.8 41.3,37.8 39.37,39.73 C25.+ | 31.95,61.27 31.95,62.38 v31.85,62.48 31.85,62.59 28.6,65.84 v28.6,70.1 | v33.27,62.48 33.27,62.28 33.07,62.08 33.07,61.27 U2.8 | 31.95,61.27 U2.10 | v28.7,78.64 SJ1.2 | v31.34,60.96 31.55,60.96 31.85,61.27 31.95,61.27
  Bottom 0.254: R20.1 47.6,32.41 45.67,32.41 44.45,33.63 C26.1 44.35,33.73 44.35,34.75 39.37,39.73 C25.+ 39.27,39.83 35.61,39.83 31.34,44.09 v31.34,60.96 | v33.27,62.48 v31.85,62.48 | v28.7,78.64 28.7,70.21 v28.6,70.1

## Text on the board
tNames: 1.0 | Cerebellar